# EAGLE board mega_pin_out_pcbway (EAGLE 7.7.0)
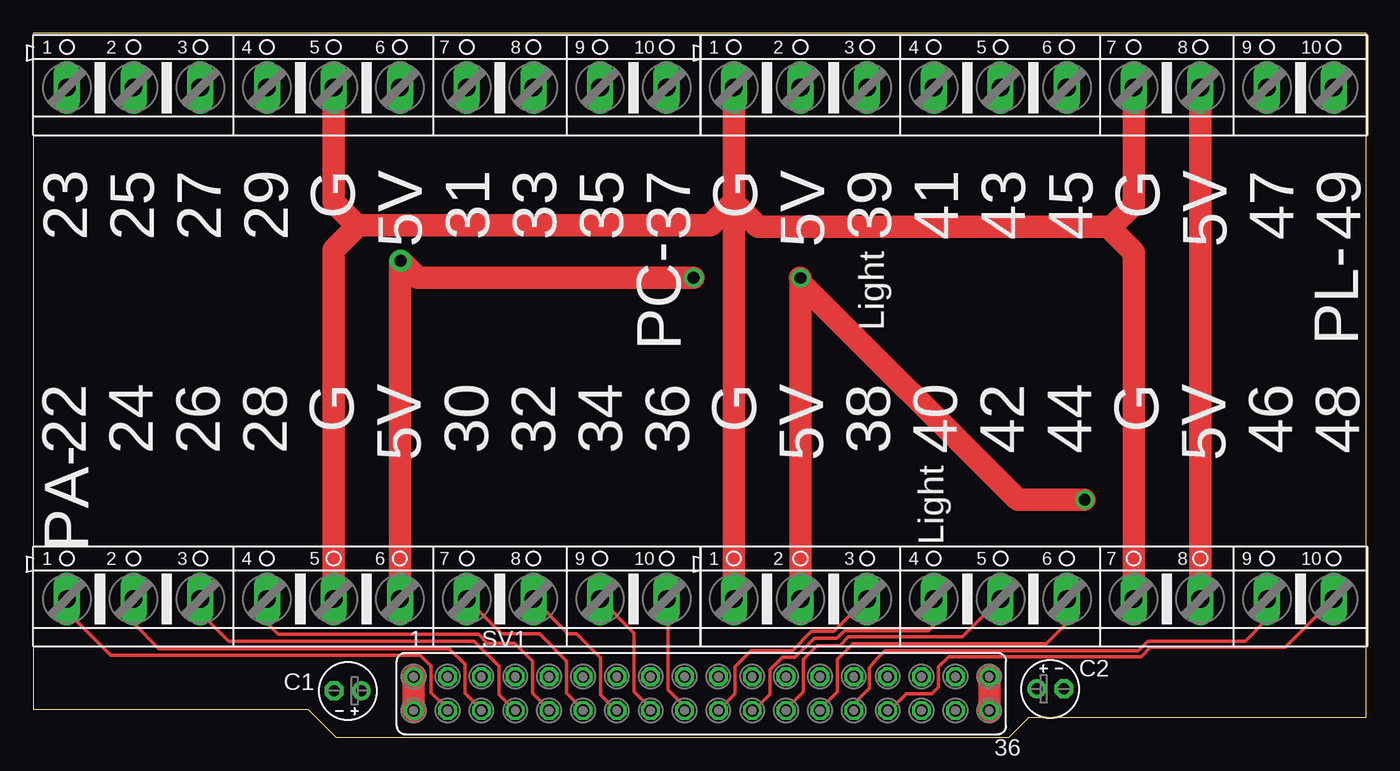
[diagram p0: board, top side]
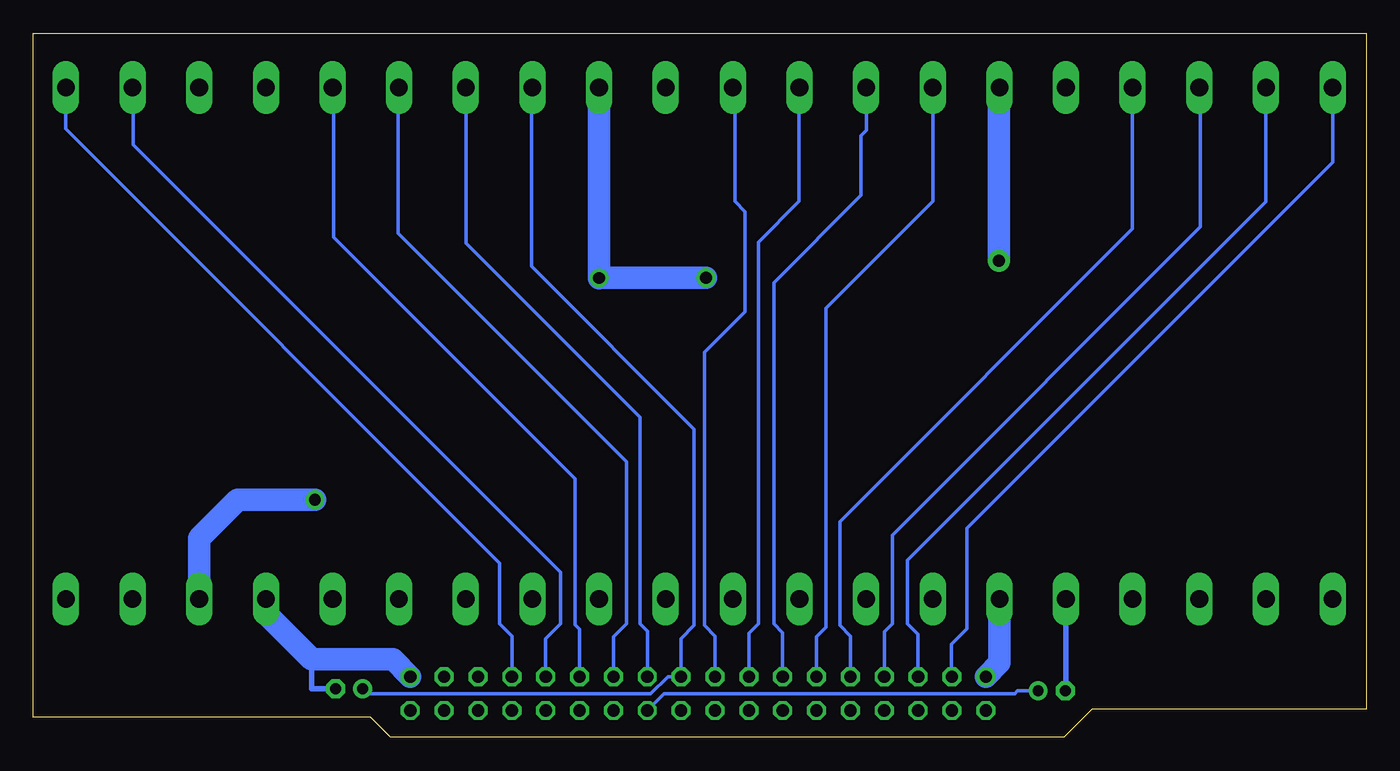
[diagram p1: board, bottom side, seen from below]

Size 100 x 52.8 mm. Coordinates in mm from the lower left corner, seen from the top.
Outline: 100,1.5 100,52.8 0,52.8 0,2.1 20.6,2.1 22.7,0 73.2,0 74.7,1.5 100,1.5
Copper layers (1*16): Top 0.035mm / dielectric 1.5mm / Bottom 0.035mm
Design rules "default": minimum track width 10mil, minimum drill 24mil, track to track 8mil, track to pad 8mil, pad to pad 8mil, via to via 8mil, smd to smd 8mil, copper to edge 40mil, drill to drill 8mil, minimum pad ring 10mil, minimum via ring 8mil, stop-mask expansion 4mil, vias tented up to drill 0mil, thermal gap 10mil

## Footprints (pad centres in the part's own frame; a part is rotated, then mirrored left to right if it is on the bottom)
E2-4 = drill 0.813 pad 1.422: + -1.016,0 | drill 0.813 pad 1.422 octagon: - 1.016,0
FE18-2 = drill 0.914: 1 -21.59,1.27 | drill 0.914 octagon: 2 -21.59,-1.27; 3 -19.05,1.27; 4 -19.05,-1.27; 5 -16.51,1.27; 6 -16.51,-1.27; 7 -13.97,1.27; 8 -13.97,-1.27; 9 -11.43,1.27; 10 -11.43,-1.27; 11 -8.89,1.27; 12 -8.89,-1.27; 13 -6.35,1.27; 14 -6.35,-1.27; 15 -3.81,1.27; 16 -3.81,-1.27; 17 -1.27,1.27; 18 -1.27,-1.27; 19 1.27,1.27; 20 1.27,-1.27; 21 3.81,1.27; 22 3.81,-1.27; 23 6.35,1.27; 24 6.35,-1.27; 25 8.89,1.27; 26 8.89,-1.27; 27 11.43,1.27; 28 11.43,-1.27; 29 13.97,1.27; 30 13.97,-1.27; 31 16.51,1.27; 32 16.51,-1.27; 33 19.05,1.27; 34 19.05,-1.27; 35 21.59,1.27; 36 21.59,-1.27
AK500/10 = drill 1.321 long: 1 -22.504,0; 2 -17.501,0; 3 -12.497,0; 4 -7.493,0; 5 -2.489,0; 6 2.489,0; 7 7.493,0; 8 12.497,0; 9 17.501,0; 10 22.504,0

## Placement (x,y rotation side)
C1  1uF  [E2-4]  23.6,3.49 180 top
C2  1uF  [E2-4]  76.3,3.64 0 top
SV1  [FE18-2]  50.13,3.28 0 top
X2  [AK500/10]  25.02,48.72 0 top
X3  [AK500/10]  75.06,48.72 0 top
X4  [AK500/10]  25.02,10.38 0 top
X5  [AK500/10]  75.06,10.38 0 top

## Library data of the parts
C1 C2 = adafruit
SV1 = con-lsta; OC_FARNELL: unknown; OC_NEWARK: unknown
X2-X5 = con-ptr500; OC_FARNELL: unknown; OC_NEWARK: unknown

## Nets
5V: SV1.1 SV1.2 X2.6 X3.2 X3.8 X4.6 X5.2 X5.8
GND: C1.- C2.- SV1.35 SV1.36 X2.5 X3.1 X3.7 X4.5 X5.1 X5.7
I31: SV1.11 X2.7
I33: SV1.13 X2.8
I35: SV1.15 X2.9
I47: SV1.27 X3.9
I49: SV1.29 X3.10
N$1: C2.+ SV1.19 X3.3
N$2: SV1.20 X5.3
N$3: SV1.3 X2.1
N$4: SV1.5 X2.2
N$9: SV1.7 X2.3
N$10: SV1.9 X2.4
N$11: SV1.17 X2.10
N$13: SV1.21 X3.4
N$14: SV1.23 X3.5
N$15: SV1.25 X3.6
N$16: SV1.4 X4.1
N$17: SV1.6 X4.2
N$18: SV1.8 X4.3
N$19: SV1.10 X4.4
N$20: SV1.12 X4.7
N$21: SV1.14 X4.8
N$22: SV1.16 X4.9
N$23: SV1.18 X4.10
N$24: C1.+ SV1.22 X5.4
N$26: SV1.24 X5.5
N$27: SV1.26 X5.6
N$28: SV1.28 X5.9
N$29: SV1.30 X5.10

## Tracks (layer width: path | path; a pad name or v marks a point on that pad's centre or on a via)
5V  (via drill 0.89 pad 1.42, 0.89 pad 1.68)
  Top 1.016: 27.51,35.69 v27.56,35.74
  Top 1.676: SV1.2 SV1.1 | X4.6 27.51,35.69 | v57.56,34.45 57.53,34.48 | X3.8 X5.8 | v27.56,35.74 28.83,34.48 49.51,34.48 v49.53,34.46 | X5.2 v57.56,34.45 | v57.56,34.45 57.56,34.11 73.86,17.81 76.7,17.81 v78.88,17.81
  Bottom 1.016: 27.56,48.67 X2.6 | 57.53,48.7 X3.2
  Bottom 1.676: X4.6 27.51,5.58 SV1.1 | v27.56,35.74 27.56,48.67 | X3.2 57.56,34.5 57.53,34.48 v57.56,34.45 57.55,34.46 v49.53,34.46 | X5.8 87.55,14.94 84.68,17.81 v78.88,17.81
GND
  Top 1.016: 24.26,38.41 24.38,38.41 | 52.58,40.19 52.39,40 52.55,39.83 | 52.58,48.7 X3.1 52.55,40.09 | 80.64,38.28 80.9,38.28
  Top 1.676: X2.5 22.53,40.14 24.26,38.41 | 52.39,40 50.8,38.41 24.38,38.41 22.53,36.56 X4.5 | 52.58,40.19 52.58,48.7 | 52.55,40.09 54.36,38.28 80.64,38.28 82.55,36.38 X5.7 | 80.9,38.28 82.55,39.94 X3.7 | SV1.36 SV1.35 | X5.1 52.55,39.83
  Bottom 0.406: C2.- 79.12,3.64 79.12,5.85 | C1.- 22.53,3.49 X4.5
  Bottom 1.676: X5.7 82.55,9.28 79.12,5.85 73.01,5.85 SV1.35
I31
  Bottom 0.254: SV1.11 41.24,7.54 40.51,8.26 40.51,32.19 32.51,40.19 X2.7
I33
  Bottom 0.254: SV1.13 43.78,7.84 44.45,8.52 44.45,34.09 37.9,40.65 37.9,45.12 37.49,45.52 37.49,47.86 37.52,47.89 X2.8 37.46,48.67
I35
  Bottom 0.254: SV1.15 46.32,7.79 45.59,8.52 45.59,37.14 42.54,40.19 42.54,48.7 X2.9
I47
  Bottom 0.254: SV1.27 61.56,7.41 60.45,8.52 60.45,12.37 92.52,44.45 92.52,48.69 X3.9
I49
  Bottom 0.254: SV1.29 64.1,7.59 65.02,8.52 65.02,13.07 97.59,45.63 97.59,48.7 X3.10
N$1
  Bottom 0.254: C2.+ 74.92,3.28 53.68,3.28 52.4,4.56 SV1.19 51.4,7.41 50.42,8.39 50.42,23.12 62.64,35.34 62.64,48.65 X3.3
N$2
  Top 0.254: X5.3 62.49,10.37 60.06,7.94 58.38,7.94 56.95,6.51 53.84,6.51 52.64,5.31 52.64,3.26 SV1.20
N$3
  Bottom 0.254: SV1.3 31.12,4.59 31.12,6.99 29.97,8.13 29.97,15.68 2.51,43.14 X2.1
N$4
  Bottom 0.254: SV1.5 33.62,7.72 34.42,8.52 34.42,13.27 7.52,40.16 X2.2 7.49,48.7
N$9
  Bottom 0.254: X2.3 12.57,48.67 12.57,48.22 12.45,48.09 12.45,38.28 35.56,15.17 35.56,8.52 36.16,7.92 SV1.7
N$10
  Bottom 0.254: SV1.9 38.7,7.59 39.5,8.39 39.5,16.19 17.53,38.16 X2.4
N$11
  Bottom 0.254: SV1.17 48.86,7.59 49.66,8.39 49.66,28.89 46.61,31.94 46.61,39.43 47.37,40.19 47.37,48.57 X2.10 47.5,48.7
N$13
  Bottom 0.254: 53.94,4.44 SV1.21 53.94,7.97 54.48,8.52 54.48,24.01 67.53,37.06 67.53,48.69 X3.4
N$14
  Bottom 0.254: SV1.23 56.48,7.54 55.5,8.52 55.5,20.66 72.63,37.79 72.63,49.3 72.79,49.45 72.79,48.95 X3.5
N$15
  Bottom 0.254: SV1.25 59.02,8.1 59.35,8.43 59.35,19.39 77.47,37.51 77.47,48.65 X3.6
N$16
  Top 0.254: SV1.4 31.08,2.13 29.85,3.36 29.85,5.34 29.03,6.15 5.82,6.15 2.51,9.46 X4.1
N$17
  Top 0.254: SV1.6 33.62,2.08 32.38,3.31 32.38,5.47 31.19,6.66 9.42,6.66 7.52,8.57 X4.2
N$18
  Top 0.254: SV1.8 36.09,2.01 34.92,3.18 34.92,5.34 33.07,7.2 14.66,7.2 13.03,8.82 12.52,8.82 X4.3
N$19
  Top 0.254: SV1.10 38.7,2.08 37.46,3.31 37.46,5.72 36.12,7.07 34.06,7.07 33.4,7.73 18.36,7.73 17.53,8.57 X4.4
N$20
  Top 0.254: SV1.12 41.24,2.08 40,3.31 40,5.72 37.97,7.75 35.13,7.75 X4.7
N$21
  Top 0.254: SV1.14 43.71,2.01 42.54,3.18 42.54,5.98 40.77,7.75 40.14,7.75 X4.8
N$22
  Top 0.254: SV1.16 46.32,2.2 45.08,3.44 45.08,7.81 X4.9
N$23
  Top 0.254: SV1.18 48.86,2.33 47.62,3.56 47.62,10.27 X4.10
N$24
  Top 0.254: SV1.22 54.07,2.01 55.28,3.22 55.28,5.08 56.2,6 57.16,6 58.59,7.43 60.28,7.43 60.84,7.99 67.14,7.99 67.56,8.41 X5.4
  Bottom 0.254: C1.+ 26.16,3.49 26.37,3.28 52.67,3.28 SV1.22
N$26
  Top 0.254: SV1.24 56.48,2.13 57.78,3.44 57.78,5.85 58.8,6.87 60.5,6.87 61.16,7.53 69.72,7.53 X5.5
N$27
  Top 0.254: SV1.26 59.02,2.13 60.32,3.44 60.32,5.85 61.49,7.02 76,7.02 77.55,8.57 X5.6
N$28
  Top 0.254: SV1.28 61.56,2.51 62.74,3.69 62.74,5.21 63.25,5.85 63.91,6.51 82.91,6.51 83.62,7.22 90.93,7.22 92.56,8.85 X5.9
N$29
  Top 0.254: SV1.30 64.24,2.01 65.51,3.28 67.44,3.28 67.92,3.77 67.92,5.29 68.68,6.05 83.13,6.05 83.82,6.74 93.92,6.74 X5.10

## Text on the board
tNames: 23 / 25 / 27 / 29 / G / 5V / 31 / 33 / 35 / 37 / G / 5V / 39 / 41 / 43 / 45 / G / 5V / 47 / 49 | PC- | Light | PL- | 22 / 24 / 26 / 28 / G / 5V / 30 / 32 / 34 / 36 / G / 5V / 38 / 40 / 42 / 44 / G / 5V / 46 / 48 | PA- | Light